# Altium PCB MainBoard.PcbDoc
Units mil, origin at the board's own origin, x right, y up, seen from the top; angles counter-clockwise.
Board outline 1122 x 925 mil, 4 copper layers (Top1, GND, PWR, Bottom4), stack 50.526 mil thick; 32 components, 52 nets, 214 pads, 134 vias.
Unrouted connection lines stored in the file: 36.
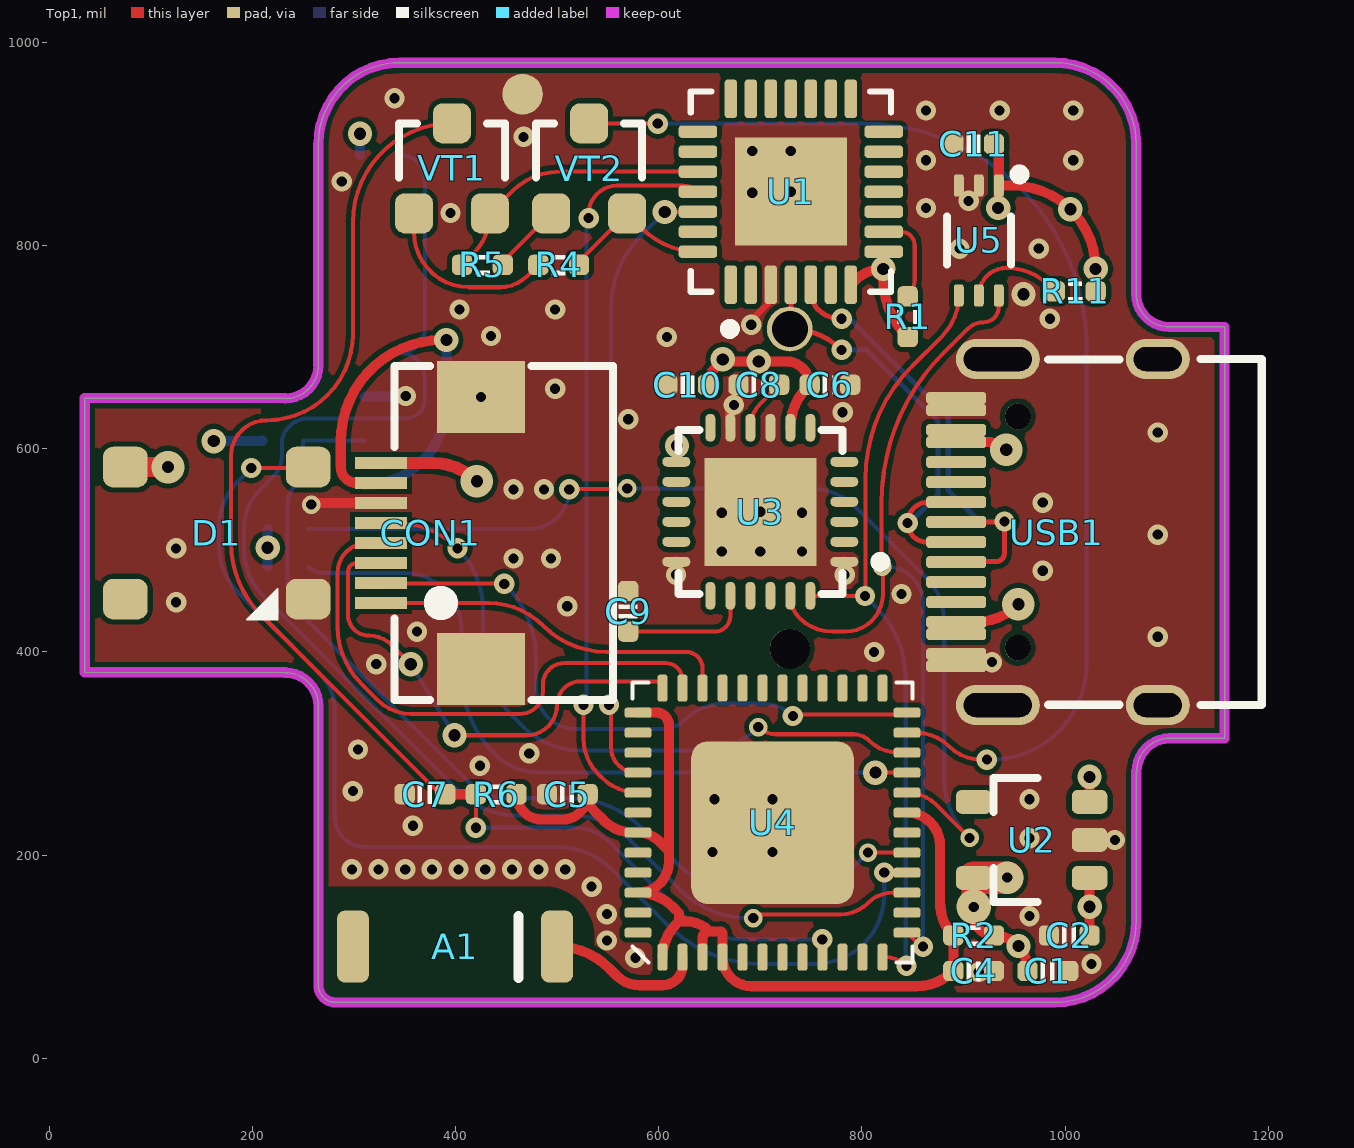
[diagram p0: Top1 view]
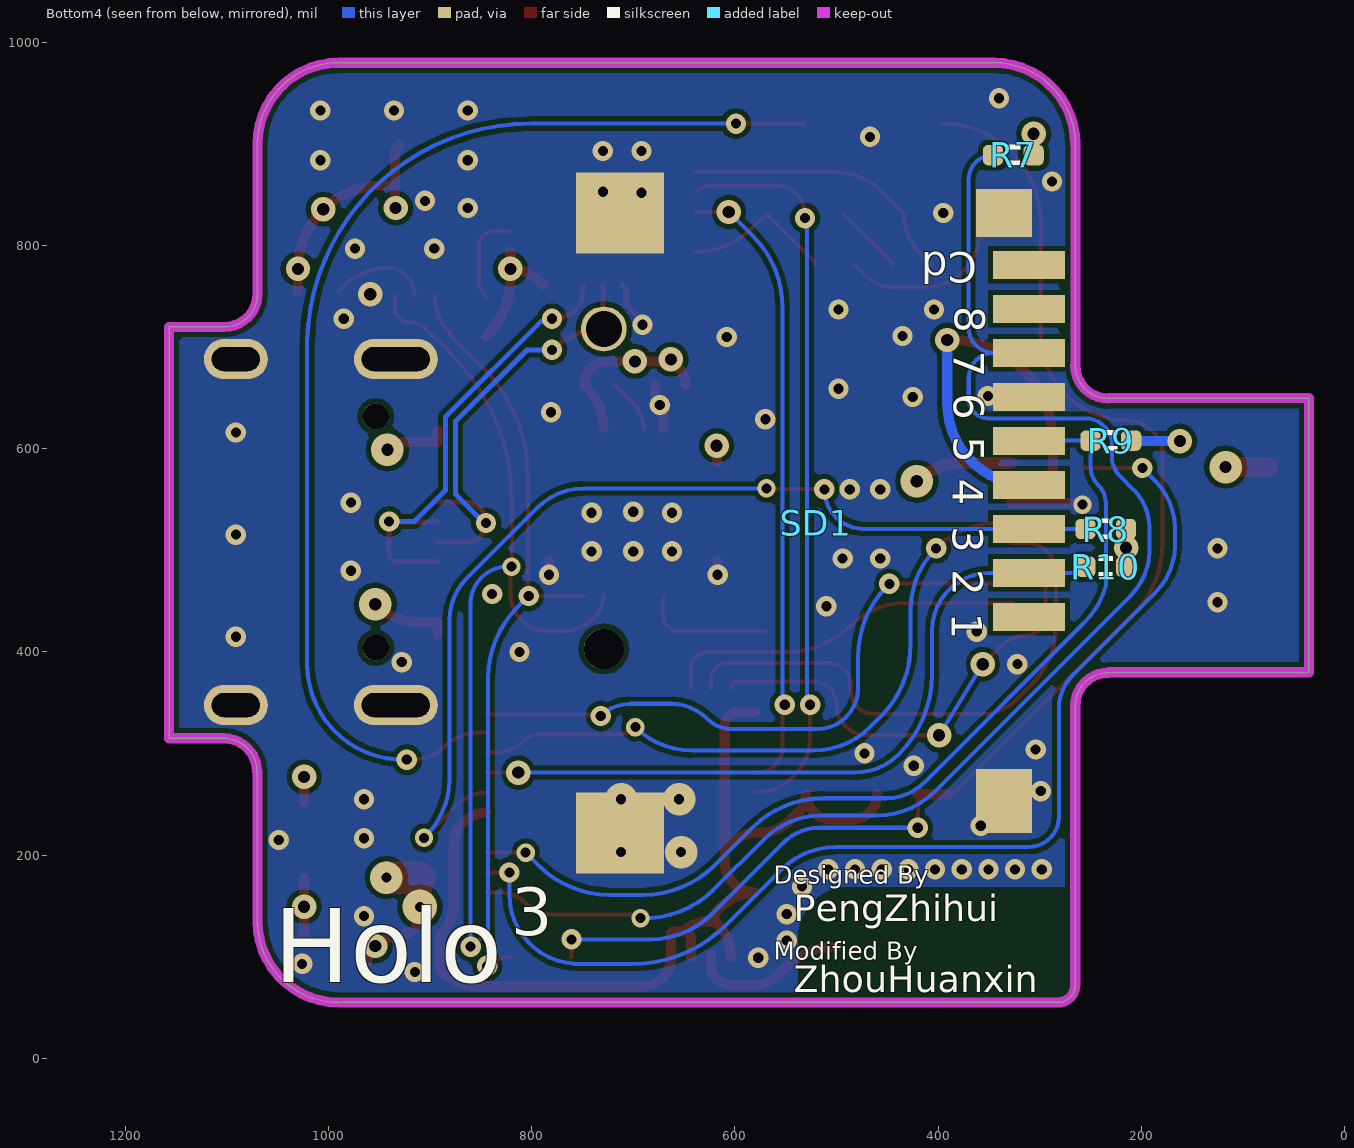
[diagram p1: Bottom4 view, seen from below]
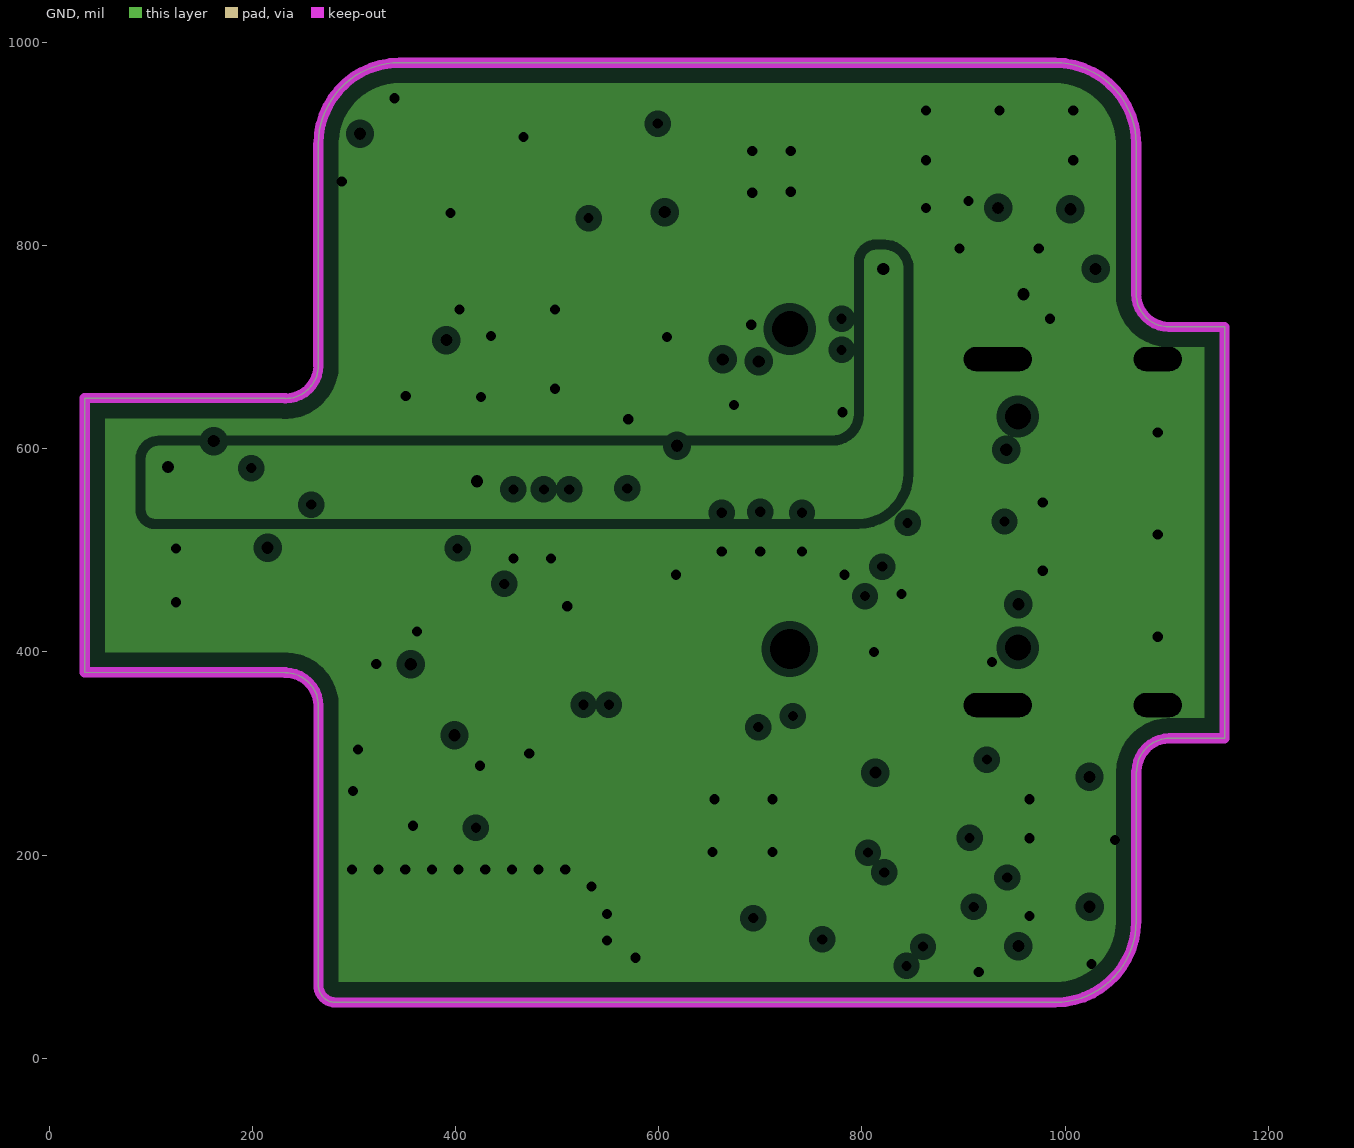
[diagram p2: GND, clearances drawn from the general rule]
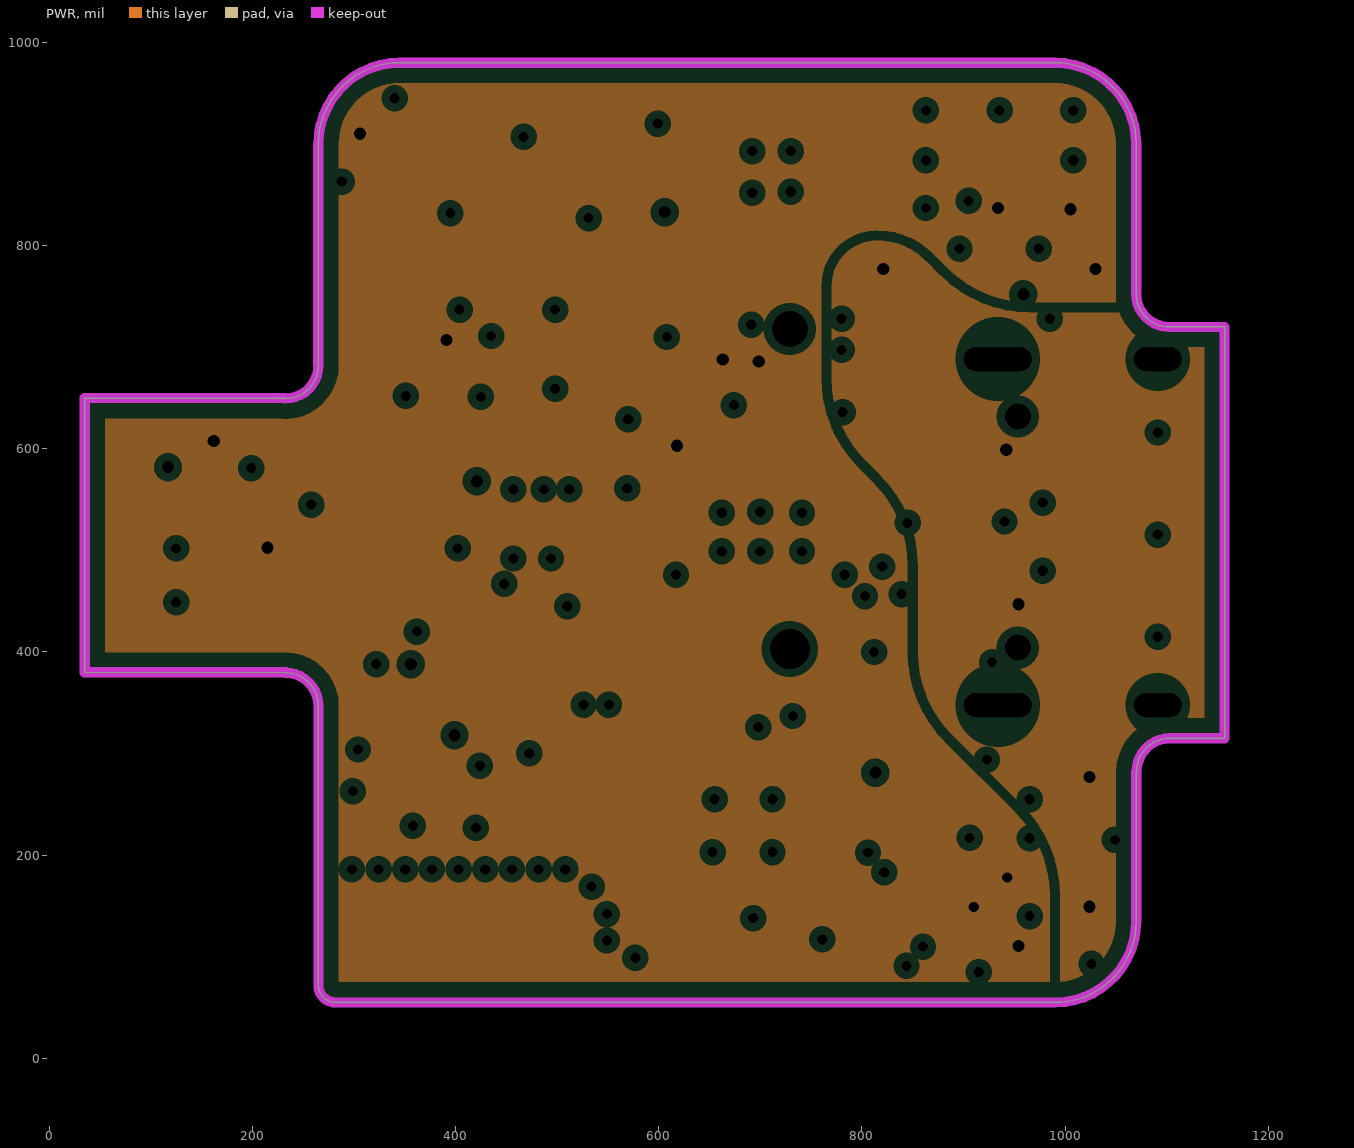
[diagram p3: PWR, clearances drawn from the general rule]
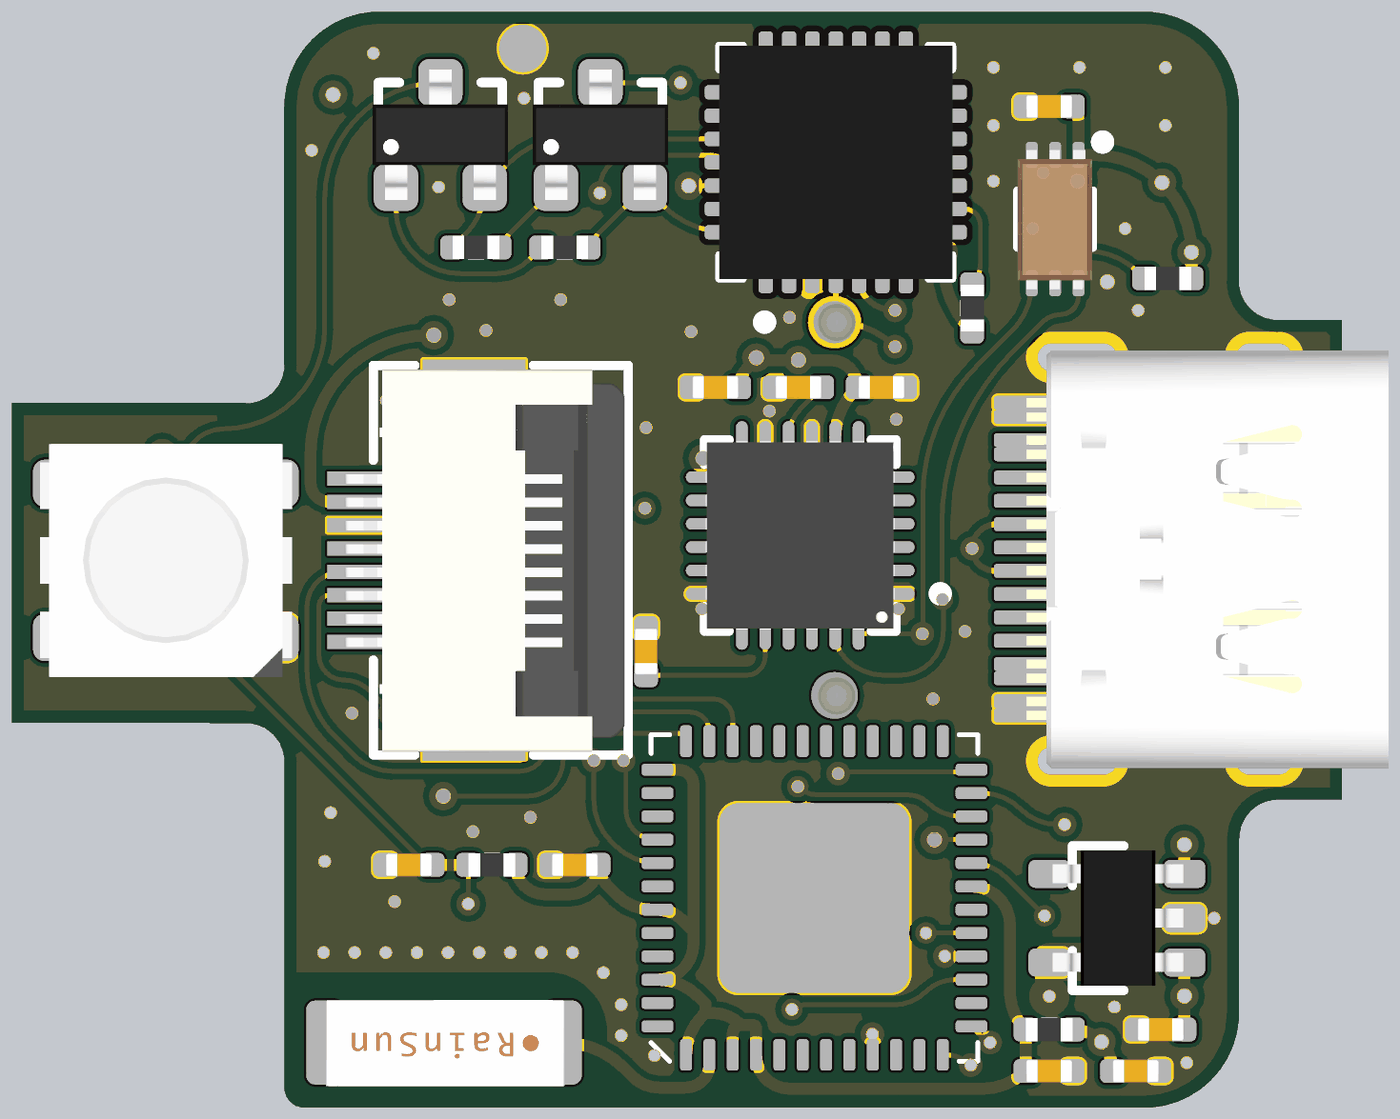
[diagram p4: 3D render of the assembled board from above, using the file's embedded part models]
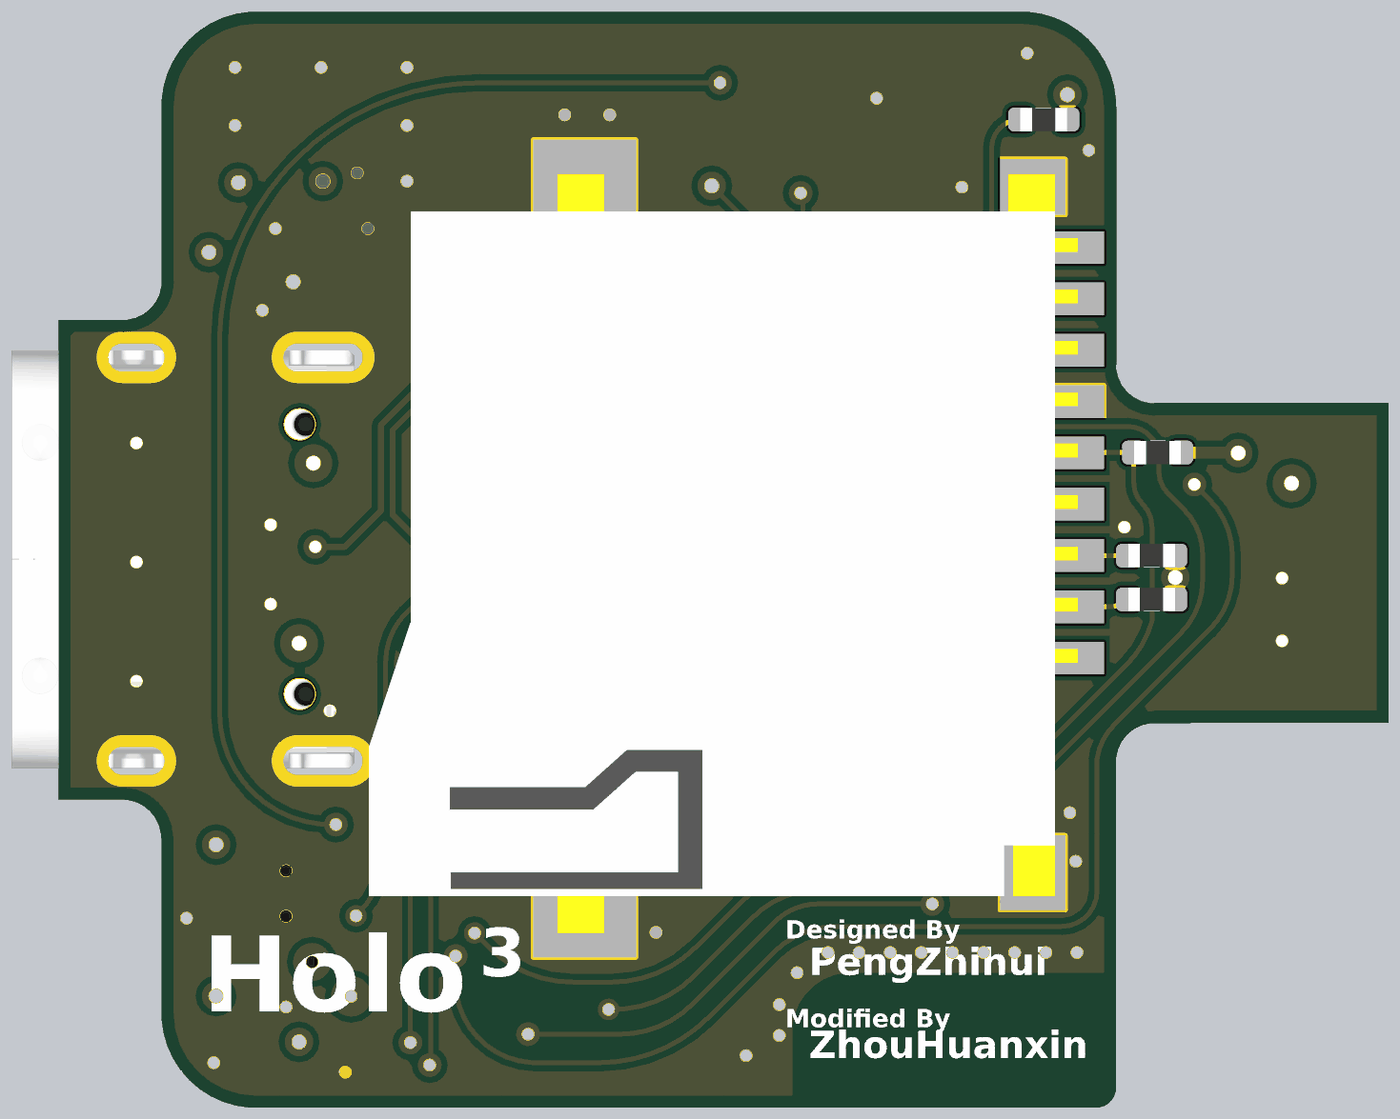
[diagram p5: 3D render of the assembled board from below, using the file's embedded part models]

## Layer stack, top to bottom
Top Solder: solder mask 0.4, Solder Resist, Dk 3.5
Top1: signal copper 1.4
Dielectric 1: prepreg 2.8, PP-006, Dk 4.1
GND: plane copper 1.378, net (Multiple Nets)
Dielectric 2: core 39.37, PP-006, Dk 4.2
PWR: plane copper 1.378, net (Multiple Nets)
Dielectric 3: prepreg 2.8, PP-006, Dk 4.1
Bottom4: signal copper 1.4
Bottom Solder: solder mask 0.4, Solder Resist, Dk 3.5

## Board outline
232.4,379.6 cw(c232.4,347) 265,347 265,72.07 ccw(c282.07,72.07) 282.07,55 990,55 ccw(c990,135) 1070,135 1070,282.4 1070.4,282.4 cw(c1103,282.4) 1103,315 1157,315 1157,720 1102.5,720 1102.5,719.9 cw(c1102.5,752.5) 1069.9,752.5 1070,752.5 1070,900 ccw(c990,900) 990,980 345,980 ccw(c345,900) 265,900 264.82,900 264.82,682 265,682 cw(c232.4,682) 232.4,649.4 232.4,649.82 35,649.82 35,380

## Design rules (kind name [scope] priority, off if disabled: settings)
BoardOutlineClearance [All] p1: gap=10 ignorepadtopadclearanceinfootprint=FALSE
Clearance [All] p1: gap=5 ignorepadtopadclearanceinfootprint=FALSE
ComponentClearance [All] p1: gap=0 collisioncheckmode=3 verticalgap=0 showdistances=FALSE
DiffPairsRouting [All] p1: maxlimit=5 minlimit=5 mostfreqgap=5 toplayer_minwidth=5 toplayer_maxwidth=5 toplayer_prefwidth=5 bottomlayer_minwidth=5 bottomlayer_maxwidth=5 bottomlayer_prefwidth=5 maxuncoupledlength=500
FanoutControl Fanout_BGA [All] p1: bgadir=Out bgaviamode=Centered fanoutstyle=Auto fanoutdirection=Alternating viagrid=1 // Fanout_BGA (Default Rule)
HoleSize [All] p1: absolutevalues=TRUE maxlimit=10000 minlimit=8 maxpercent=80.000 minpercent=20.000
MinimumSolderMaskSliver [All] p1 off: minsoldermaskwidth=2
PlaneClearance [All] p1: clearance=8
PlaneConnect [All] p1: planeconnectstyle=Direct reliefexpansion=20 reliefentries=4 reliefconductorwidth=10 reliefairgap=10
PolygonConnect [All] p1: connectstyle=Direct reliefconductorwidth=10 reliefentries=4 polygonreliefangle="90 Angle" airgapwidth=10
RoutingVias [All] p1: holewidth=8 width=16 viastyle="Through Hole" minholewidth=6 minwidth=12 maxholewidth=28 maxwidth=50
SilkToBoardRegionClearance [All] p1 off:
SilkToSilkClearance [All] p1: silktosilkclearance=0
SilkToSolderMaskClearance [IsPad] p1: minsilkscreentomaskgap=0 clearancetoexposedcopper=TRUE
SolderMaskExpansion [All] p1: expansion=2 istentingtop=FALSE
Width [All] p1: maxlimit=10000 minlimit=4 preferedwidth=4
20 further rules are at their usual default settings.

## Classes and differential pairs
net class GND: GND
component class Main: A1 C1 C2 C4 C5 C6 C7 C8 C9 C10 C11 D1 R1 R2 R4 R5 R6 R7 R8 R9 R10 R11 U1 U2 U3 U4 U5 USB1 VT1 VT2
differential pair USB2.0: +USB-PWR-DP -USB-PWR-DM

## Components (designator, comment, footprint, x,y, rotation, side; value= is the part's Value field where it differs from the comment)
A1 "RAINSUN" ANT-Rainsun-AN5120 400,110 r180 top
C1 "1uF" CAP_0402 983,86 r180 top value=0.1u
C2 "1uF" CAP_0402 1004.06,121 r0 top value=0.1u
C4 "10uF" CAP_0402 910,86 r180 top value=0.1u
C5 "0.1uF" CAP_0402 510,260 r0 top value=0.1u
C6 "10nF" CAP_0402 768.5,663 r0 top value=0.1u
C7 "2.2uF" CAP_0402 370,260 r180 top value=0.1u
C8 "0.1uF" CAP_0402 698.5,663 r180 top value=0.1u
C9 "2.2nF" CAP_0402 570,440 r270 top value=0.1u
C10 "0.1uF" CAP_0402 628.5,663 r0 top value=0.1u
C11 "0.1uF" CAP_0402 910,900 r180 top value=0.1u
CON1 "FFC_0.5_8" FPC0.5-8P 425,517.14 r90 top
D1 "RGB" LED_5050_WS2812B 165,517 r0 top
R1 "10K" RES_0402 845,730 r90 top value=22R
R2 "0R" RES_0402 910,121 r180 top value=22R
R4 "12K" RES_0402 501.5,781 r180 top value=22R
R5 "12K" RES_0402 426.5,781 r0 top value=22R
R6 "10K" RES_0402 440,260 r180 top value=22R
R7 "10K" RES_0402 326,889 r0 bottom value=22R
R8 "10K" RES_0402 235,521 r0 bottom value=22R
R9 "10K" RES_0402 230,608 r0 bottom value=22R
R10 "10K" RES_0402 235,484 r0 bottom value=22R
R11 "10K" RES_0402 1010,755 r0 top value=22R
SD1 "Comment" "Micro SD ( TF CARD )" 713.25,832.13 r270 bottom locked
U1 "CP2102" QFN-28 730,853 r90 top locked value=Value
U2 "LP2992 3V3" SOT23-5 965,215 r180 top
U3 "MPU6050" QFN-24 700,538 r180 top locked
U4 "ESP32_SIP" QFN-48_7X7 712,232 r90 top locked
U5 "BH1750FVI-TR" BH1750FVI 915,805 r270 top
USB1 "Type-C" Type-C-TOP 992,518 r0 top
VT1 "S8050" SMT_TRIODE_NPN 396.5,876 r0 top
VT2 "S8050" SMT_TRIODE_NPN 531.5,876 r0 top

## Footprints (in the part's own frame and the unit in brackets; to place one, negate y for a bottom-side part, rotate by r counter-clockwise, add the part's x,y. Pads: shape width x height; smd on the part's side, far side on the other; paste and mask are expansions set on the pad)
ANT-Rainsun-AN5120 [mm] "选择焊盘"
  rrect50% 0.8x1.8 smd: 1(-2.54,0) ""(2.563,0)
  silkscreen extent -1.57,-0.76 -1.57,0.79, body extent -2.57,-0.91 2.54,0.94, height 1.32
BH1750FVI [mm]
  rrect50% 0.55x0.25 smd paste+0 mask+0: 1(-1.375,0.5) 2(-1.375,0) 3(-1.375,-0.5) 4(1.375,-0.5) 5(1.375,0) 6(1.375,0.5)
  silkscreen extent -1.78,-0.8 0.6,1.14, body extent -1.49,-0.81 1.51,0.79, height 0.77
CAP_0402 [mil]
  rrect50% 20x20 smd: 1(-20,0) 2(20,0)
  silkscreen extent -7,-9 7,9, body extent -20,-10 20,10, height 20
FPC0.5-8P [mm]
  rect 1.8x2.2 smd: 0(-3.4,0) 0(3.4,0)
  rect 0.3x1.3 smd: 1(-1.75,2.497) 2(-1.25,2.497) 3(-0.75,2.497) 4(-0.25,2.497) 5(0.25,2.497) 6(0.75,2.497) 7(1.25,2.497) 8(1.75,2.497)
  silkscreen extent -4.17,-3.3 4.17,2.16, body extent -4.11,-3.23 4.09,2.77, height 2
LED_5050_WS2812B [mil]
  rrect50% 44x40 smd: 1(-90,65) 2(-90,-65) 3(90,-65) 4(90,65)
  silkscreen extent 30,-85 60,-55, body extent -106,-98 106,98, height 69
"Micro SD ( TF CARD )" [mm]
  rect 2.032x2.2 smd: 0(0,0) 0(15.5,0)
  rect 1.2x1.4 smd: 0(0,9.6)
  oval 1.118x1.143 hole 0.9: 0(2.9,-0.4)
  round 1 hole 1 unplated: 0(10.9,-0.4)
  rect 1.6x1.4 smd: 0(14.7,9.6)
  rect 0.7x1.8 smd: 1(10.1,10.227) 2(9,10.227) 3(7.9,10.227) 4(6.8,10.227) 5(5.7,10.227) 6(4.6,10.227) 7(3.5,10.227) 8(2.4,10.227) 9(1.3,10.227)
  body extent -0.27,-4.63 16,10.57, height 1.8
QFN-24 [mm] "QFN, 24-Leads, Body 4.1x4.1mm (max), Pitch 0.50mm, IPC Low Density"
  oval 0.7x0.25 smd: 1(-2.1,1.25) 2(-2.1,0.75) 3(-2.1,0.25) 4(-2.1,-0.25) 5(-2.1,-0.75) 6(-2.1,-1.25) 13(2.1,-1.25) 14(2.1,-0.75) 15(2.1,-0.25) 16(2.1,0.25) 17(2.1,0.75) 18(2.1,1.25)
  oval 0.25x0.7 smd: 7(-1.25,-2.1) 8(-0.75,-2.1) 9(-0.25,-2.1) 10(0.25,-2.1) 11(0.75,-2.1) 12(1.25,-2.1) 19(1.25,2.1) 20(0.75,2.1) 21(0.25,2.1) 22(-0.25,2.1) 23(-0.75,2.1) 24(-1.25,2.1)
  rect 2.8x2.7 smd: ""(0,0)
  silkscreen extent -3.13,-2.05 2.05,2.05, body extent -2.02,-2.02 2.02,2.02, height 0.95
QFN-28 [mil]
  rrect50% 38x12 smd mask+5: 1(-91.5,59.06) 2(-91.5,39.37) 3(-91.5,19.68) 4(-91.5,0) 5(-91.5,-19.69) 6(-91.5,-39.37) 7(-91.5,-59.06) 15(91.5,-59.06) 16(91.5,-39.37) 17(91.5,-19.69) 18(91.5,0) 19(91.5,19.68) 20(91.5,39.37) 21(91.5,59.06)
  rrect50% 12x38 smd mask+5: 8(-59.06,-91.5) 9(-39.37,-91.5) 10(-19.68,-91.5) 11(0,-91.5) 12(19.69,-91.5) 13(39.37,-91.5) 14(59.06,-91.5) 22(59.06,91.5) 23(39.37,91.5) 24(19.69,91.5) 25(0,91.5) 26(-19.68,91.5) 27(-39.37,91.5) 28(-59.06,91.5)
  rect 106.3x110.24 smd: 29(0,0)
  silkscreen extent -140,-98 98,98, body extent -98,-98 98,98, height 35
QFN-48_7X7 [mm]
  rrect20% 4.064x4.064 smd: 0(0,0)
  rrect50% 0.675x0.25 smd: 1(-3.363,2.75) 2(-3.363,2.25) 3(-3.363,1.75) 4(-3.363,1.25) 5(-3.363,0.75) 6(-3.363,0.25) 7(-3.363,-0.25) 8(-3.363,-0.75) 9(-3.363,-1.25) 10(-3.363,-1.75) 11(-3.363,-2.25) 12(-3.363,-2.75) 25(3.363,-2.75) 26(3.363,-2.25) 27(3.363,-1.75) 28(3.363,-1.25) 29(3.363,-0.75) 30(3.363,-0.25) 31(3.363,0.25) 32(3.363,0.75) 33(3.363,1.25) 34(3.363,1.75) 35(3.363,2.25) 36(3.363,2.75)
  rrect50% 0.25x0.675 smd: 13(-2.75,-3.363) 14(-2.25,-3.363) 15(-1.75,-3.363) 16(-1.25,-3.363) 17(-0.75,-3.363) 18(-0.25,-3.363) 19(0.25,-3.363) 20(0.75,-3.363) 21(1.25,-3.363) 22(1.75,-3.363) 23(2.25,-3.363) 24(2.75,-3.363) 37(2.75,3.363) 38(2.25,3.363) 39(1.75,3.363) 40(1.25,3.363) 41(0.75,3.363) 42(0.25,3.363) 43(-0.25,3.363) 44(-0.75,3.363) 45(-1.25,3.363) 46(-1.75,3.363) 47(-2.25,3.363) 48(-2.75,3.363)
  silkscreen extent -3.5,-3.5 3.5,3.5, body extent -3.5,-3.5 3.5,3.5, height 1
RES_0402 [mil]
  rrect50% 20x20 smd: 1(-20,0) 2(20,0)
  silkscreen extent -7,-10 7,10, body extent -20,-10 20,10, height 14
SMT_TRIODE_NPN [mm] "Surface mount NPN transistor, package SOT-23"
  rrect50% 0.95x1 smd: 1(-0.95,-1.125) 2(0.95,-1.125) 3(0,1.125)
  silkscreen extent -1.33,-0.22 1.32,1.13, body extent -1.45,-1.4 1.45,1.4, height 1.3
SOT23-5 [mm] "SOT23, 3-Leads, Body 3.1x3.0mm (max), Pitch 0.95mm, IPC Medium Density"
  rrect50% 0.889x0.6 smd: 1(-1.5,0.95) 2(-1.5,0) 3(-1.5,-0.95) 4(1.396,-0.95) 5(1.396,0.95)
  silkscreen extent -0.2,-1.55 0.9,1.55, body extent -1.48,-1.45 1.32,1.45, height 1.2
Type-C-TOP [mm]
  round 0.65 hole 0.65: 0(-0.98,-2.89) 0(-0.98,2.89)
  oval 1.6x1 hole 0.6 slot 1.2 at 0 deg: 1(2.52,4.325) 2(2.52,-4.325)
  oval 2.1x1 hole 0.6 slot 1.7 at 0 deg: 3(-1.48,-4.325) 4(-1.48,4.325)
  rrect50% 1.5x0.3 smd: A1(-2.52,-3.35) A4(-2.52,-2.55) A5(-2.52,-1.25) A6(-2.52,-0.25) A7(-2.52,0.25) A8(-2.52,1.25) A9(-2.52,2.55) A12(-2.52,3.35) B1(-2.52,3.05) B4(-2.52,2.25) B5(-2.52,1.75) B6(-2.52,0.75) B7(-2.52,-0.75) B8(-2.52,-1.75) B9(-2.52,-2.25) B12(-2.52,-3.05)
  silkscreen extent -0.22,-4.33 5.12,4.33, body extent -2.57,-4.48 5.18,4.48, height 3.26

## Part data
A1: library part ANT-Rainsun-AP5120
C1 C2 C4 C5 C6 C7 C8 C9 C10 C11: library part 电容-0402, "Capacitor"
D1: library part LED_5050_WS2812B, "LED", Type=5050
R1 R2 R4 R5 R6 R7 R8 R9 R10 R11: library part 电阻-0402, "Resistor"
U1: "USB转TTL", MFG #1="SILICON LABS", PART DESC="SINGLE-CHIP USB TO UART BRIDGE, QFN28, RoHS.", PART NUMBER=CP2102, RefDes=RefDes, Type=DEV
U2: library part LP2992, "LDO"
U3: "六轴传感器"
U4: library part ESP32-PICO
USB1: library part USB-Type-C-TOP
VT1 VT2: library part SMT_TRIODE_NPN, "Surface mount NPN transistor, package SOT-23"

## Free pads (board coordinates)
  round 40 smd: 7(466,949)

## Via types
v1: diameter 20, hole 10, Top1 to Bottom4, tented both sides, 98 vias
v2: diameter 24, hole 12, Top1 to Bottom4, tented both sides, 19 vias
v3: diameter 18, hole 10, Top1 to Bottom4, tented both sides, 7 vias
v4: diameter 32, hole 10, Top1 to Bottom4, tented both sides, 5 vias
v5: diameter 32, hole 12, Top1 to Bottom4, tented both sides, 4 vias
v6: diameter 34, hole 10, Top1 to Bottom4, tented both sides, 1 vias

## Nets (pads, with @x,y where several pads share a name; then routed paths per layer and width w, separated by ;. In a path a pad name is that pad's centre, name@x,y a point inside that pad or via, vN(x,y) a via of type N, cw(c..) or ccw(c..) an arc to the next point about the centre after c; other vN are vias at no path point)
3V3: C1.2 C6.1 C10.2 C11.1 CON1.7 R2.1 R7.1 R8.1 R9.1 R10.1 R11.2 SD1.4 U2.5 U3.8 U3.13 U5.1 | length 1103.2
  Top1 w10: CON1.7 302.74,566.35 cw(c302.74,582.1) 287,582.1 287,607 cw(c387,607) 387,707 v2(391,707) ; U3.13 617.58,587.21 617.66,587.29 617.66,602.66 v2(618,603) ; C10.2 cw(c671.5,663) 671.5,686 725.5,686 cw(c725.5,663) C6.1 746.04,660.54 ccw(c785.9,620.68) U3.8 ; v6(910.06,149.07) 910.06,140.94 ccw(c930,140.94) R2.1 cw(c930,88) 963,88 C1.2 ; C11.1 cw(c918.69,888.69) 934.69,888.69 U5.1 ; v2(934,837) 934.61,837.61 934.61,859.06 U5.1 ; R11.2 v2(1030,777) ccw(c947.87,777) 947.87,859.13 U5.1
  Top1 w24: v6(910.06,149.07) U2.5
  Top1 w32: U2.5 910.46,178 v4(943,178)
  Bottom4 w10: v2(162,607.56) 162.22,607.78 209.78,607.78 R9.1 ; R10.1 R8.1 ; R7.1 v2(306,910) ; SD1.4 ccw(c310.61,644.8) 391,644.8 v2(391,707)
  other v2: 954.08,110.56 215,502.5 698.5,686 663,688 1005.19,835.82
3V3A: C4.2 C5.2 R2.2 R6.1 U4.1 U4.3 U4.4 U4.19 U4.37 U4.43 U4.46 | length 1042.2
  Top1 w10: R6.1 ccw(c485,260) 485,235 505,235 ccw(c505,260) C5.2 ccw(c554.14,260) 537.07,242.93 545.76,234.24 ccw(c574.93,263.42) 574.93,222.16 U4.43 cw(c579.62,192.06) 600.9,213.34 610,204.24 ; U4.37 597.73,340.27 cw(c597.73,328) 610,328 610,204.24 ; U4.1 cw(c649.88,99.62) 617.23,132.23 ; 617.25,132.25 620,135 ; U4.3 643.1,118.1 cw(c650,118.1) 650,125 ; U4.19 cw(c844.38,209.22) 877,209.22 877,152.38 ccw(c921.38,152.38) 877.14,148.86 ccw(c921.38,152.38) R2.2 C4.2 ; C4.2 cw(c853.79,122.21) 853.79,71 691.41,71 cw(c691.41,99.62) U4.4 662.79,122.21 ccw(c660,122.21) 660,125 650,125 ; 610,204.24 610,193.48 cw(c579.62,193.48) U4.46 cw(c579.62,114.14) 614.24,148.76 620,143 620,135 ; 620,135 625.86,135 cw(c625.86,100.86) 649.98,125.02
BH_SCL: U3.23 U4.13 U5.6 | length 890.8
  Top1 w4: U3.23 ccw(c760.47,455.32) 738.56,433.48 ccw(c771.05,465.91) 771.06,420 783.75,420 ccw(c783.75,456.93) 820.68,456.93 820.68,483.32 v3(820,484) 819.46,484.54 819.46,546.63 ; 819.46,546.66 cw(c1026.64,547.57) 880.16,694.1 904.14,718.07 cw(c919.41,702.84) 919.41,724.41 ccw(c919.41,739.69) 934.69,739.69 U5.6 ; U4.13 856.7,111.41 ccw(c860.11,114.83) v1(860.11,110)
  Bottom4 w4: v3(820,484) 823.87,484 cw(c823.87,447.75) 860.11,447.75 v1(860.11,110)
BH_SDA: U3.24 U4.12 U5.4 | length 781.4
  Top1 w4: U3.24 749.54,455 v1(803,455) 803.46,455.46 803.46,570.6 cw(c959.68,570.75) 849.21,681.21 878.68,710.68 ccw(c838.46,750.87) U5.4 ; U4.12 823.06,99.62 cw(c823.06,70.19) 832.87,97.93 cw(c823.06,70.19) v1(843.87,91)
  Bottom4 w4: v1(803,455) 813.82,444.18 cw(c743.11,373.46) 843.11,373.81 cw(c743.11,373.46) 843.11,373.46 843.11,91.75 v1(843.87,91)
CP_Rx: U1.25 U4.41 | length 726.8
  Top1 w4: v1(526,348) 526,314.6 ccw(c575.16,314.6) 540.4,279.84 543.92,276.31 ccw(c579.62,312.01) U4.41 ; v1(531,827) 531,831 cw(c559,831) 559,859 624.01,859 cw(c624.01,838.51) U1.25
  Bottom4 w4: v1(526,348) 529,351 529,825 v1(531,827)
CP_Tx: U1.26 U4.40 | length 619.6
  Top1 w4: v1(551,348) 553,346 553,306.27 ccw(c578.06,306.27) 578.06,281.21 U4.40 ; v2(606,833) 638.19,833 U1.26
  Bottom4 w4: v1(551,348) 553,350 553,738.58 cw(c653,738.58) 582.29,809.29 v2(606,833)
DC: CON1.5 U4.22 | length 671.9
  Top1 w4: CON1.5@328,526.84 342.03,526.84 cw(c342.03,442.03) v1(402,502) ; v3(698,326) ccw(c714.9,342.9) 714.9,319 791.74,319 cw(c791.74,296.63) 807.55,312.45 ccw(c835.47,340.41) 835.47,300.9 U4.22
  Bottom4 w4: v1(402,502) cw(c341.64,441.64) 427,441.64 427,407.46 ccw(c527,407.46) 456.29,336.74 467.01,326.02 ccw(c522.61,381.63) 522.62,303 642.47,303 ccw(c642.47,381.53) v3(698,326)
DTR: R4.1 U1.28 VT2.2 | length 152.3
  Top1 w4: R4.1 521.5,784.31 VT2.2 VT2.2@584.16,816.46 ; VT2.2@584.18,816.43 ccw(c638.5,870.8) U1.28
EN: C7.1 R6.2 U4.9 VT1.3 | length 1331.1
  Top1 w4: C7.1 cw(c390,272.07) 381.46,263.54 271.54,373.46 208.29,436.71 cw(c279,507.42) 179,507.42 179,593 cw(c214,593) 214,628 ccw(c214,713) 299,713 299,822.79 cw(c396.5,822.79) VT1.3 ; v1(420,227) R6.2 ; v1(760.89,117.11) 761.05,116.95 761.05,99.78 U4.9
  Top1 w10: C7.1 R6.2
  Bottom4 w4: v1(420,227) 516.61,227 cw(c516.61,176.44) 528.41,225.6 cw(c516.61,176.44) 540.2,221.16 cw(c516.61,176.44) 546.96,216.87 cw(c516.61,176.44) 552.36,212.19 cw(c485.31,138) 556.02,208.71 622.44,142.29 ccw(c683.24,203.09) 683.24,117.11 v1(760.89,117.11)
FLASH_CLK: U4.31
FLASH_CS: U4.25
FLASH_SD0: U4.27
FLASH_SD1: U4.33
FLASH_SD2: U4.30
FLASH_SD3: U4.32
GND: C1.1 C2.1 C4.1 C5.1 C6.2 C7.2 C8.2 C9.1 C10.1 C11.2 CON1.0 CON1.6 D1.3 pad.7 SD1.0@335.3,253.39 SD1.0@335.3,832.13 SD1.0@713.25,221.9 SD1.0@713.25,832.13 SD1.6 U1.3 U1.29 U2.2 U3. U3.1 U3.9 U3.11 U3.18 U4.0 U5.2 U5.3 USB1.1 USB1.2 USB1.3 USB1.4 USB1.A1 USB1.A12 USB1.B1 USB1.B12 | length 229.1
  Top1 w6: v1(691,722) 693.68,724.68 693.68,728.86 707.32,742.5 707.32,758.5 U1.3
  Top1 w10: v3(258,545) cw(c261.69,541.31) 261.69,546.53 CON1.6@328,546.53 ; v1(617,476) 617.16,476.16 617.16,488.71 617.24,488.79 U3.18 ; U3.11 670.47,634.48 cw(c682.52,634.48) v1(674,643) ccw(c663.14,653.86) 678.5,653.86 C8.2 ; U3.1 U3.1 782.84,488.71 782.84,476.16 v1(783,476)
  Bottom4 w10: SD1.6 311.1,651.52 350.52,651.52 v1(351,652)
  other v1: 915,85 1026,93 577,99 549,116 965,140 549,142 534,169 298,186 324.25,186 350.5,186 376.75,186 403,186 429.25,186 455.5,186 481.75,186 508,186 1049,215 965,216.67 358,229 965,255 299,263 424,288 472.5,300.18 304,304 322,388 928,390 812,400 1091.21,415 362,420 510,445 125,449 839,457 978,480 457,492 494,492 662,499 700,499 741,499 125,502 1091.21,515.5 662,537 741,537 700,538 978,547 457,560 487,560 1091.21,616 570,629 781,636 425,651 498,659 608,710 435,711 985,728 404,737 498,737 896,797 974,797 395,832 863,837 905,844 692,852 730,853 288,863 863,884 1008,884 692,893 730,893 467,907 863,933 935.5,933 1008,933 340,945
  other v2: 959,752
  other v4: 653,203 712,203 655,255 712,255
GPIO0: U4.23 VT2.3 | length 1164.7
  Top1 w4: VT2.3 531.79,920 v1(599,920) ; U4.23 853.27,320.58 cw(c853.27,274.35) 885.93,307.07 ; 885.96,307.04 ccw(c917.44,338.53) 917.44,294 v1(923,294)
  Bottom4 w4: v1(599,920) 801.19,920 cw(c801.19,700.09) 1021,706.57 1021,388.05 cw(c926.94,388.05) v1@923,294.07
GPIO4: CON1.2 U4.24 | length 631.3
  Top1 w4: CON1.2@328,467.79 328.39,467.39 447.61,467.39 v1(448,467) ; v1(732,337) 733.63,338.63 842.75,338.63 U4.24
  Bottom4 w4: v1(448,467) 449.71,465.29 cw(c379,394.58) 479,394.58 479,364 ccw(c519,364) 519,324 602.86,324 ccw(c602.86,358.14) 627,334 cw(c663.21,297.79) 663.21,349 703.03,349 cw(c703.03,308.03) v1(732,337)
GPIO5: CON1.1 U4.34 | length 358
  Top1 w4: CON1.1 432.3,448.24 cw(c432.3,372.3) 486,426 ccw(c548.77,488.77) 548.77,400 627,400 cw(c627,383.9) 643.1,383.9 U4.34
GPIO9: U4.28
GPIO10: U4.29
GPIO12: U4.18
GPIO13: R8.2 SD1.3 U4.20 | length 1010.7
  Top1 w4: v1(512,560) 512.5,560.5 568.5,560.5 v3(569,561) ; U4.20 cw(c844.38,220.27) 873.56,249.44 v3(906,217)
  Bottom4 w4: R8.2 310.61,521 SD1.3 473.11,521.11 ccw(c473.11,560) 477.34,521.34 ccw(c473.11,560) 511.77,555.77 ccw(c473.11,560) v1(512,560) ; v3(569,561) 748.57,561 cw(c748.57,496.17) 794.4,542.02 863.71,472.71 cw(c821.97,430.97) 881,430.97 881,275.34 ccw(c961.5,275.34) 904.58,218.42 v3(906,217)
GPIO14: R9.2 SD1.5 U4.17 | length 951.6
  Top1 w4: v3(806,202.47) U4.17
  Bottom4 w4: SD1.5 310.61,608 R9.2 250,581.9 cw(c226.1,581.9) 243,565 ccw(c261.87,545.45) 234.7,545.45 234.7,465.6 ccw(c315.8,488.3) 256.25,428.75 413.25,271.75 ccw(c451.28,309.79) 451.31,256 512.58,256 cw(c512.58,156) 583.29,226.71 619.71,190.29 ccw(c690.42,261) 690.42,161 723.11,161 ccw(c723.11,261) 793.82,190.29 v3(806,202.47)
GPIO15: R10.2 SD1.2 U4.21 | length 726
  Top1 w4: v2(813.21,281.21) U4.21
  Bottom4 w4: R10.2 ccw(c269.96,498.96) 267.08,478 ccw(c269.96,498.96) 269.96,477.8 SD1.2 349.2,477.8 cw(c349.2,421) 406,421 406,378.12 ccw(c517.26,378.08) 438.6,299.4 ; 438.6,299.4 ccw(c482.52,343.33) 482.52,281.21 v2(813.21,281.21)
GPIO18: CON1.4 U4.35 | length 551.5
  Top1 w4: CON1.4@328,507.16 313.16,507.16 ccw(c313.16,478) 284,478 284,425.04 ccw(c363.98,425.04) 307.42,368.49 323.2,352.72 ccw(c356.31,385.83) 356.31,339 463.49,339 ccw(c463.49,361.51) 486,361.51 486,368 cw(c507,368) 507,389 607,389 cw(c607,372.58) 623.42,372.58 U4.35
GPIO19: U4.38
GPIO21: U4.42
GPIO22: U4.39
GPIO23: CON1.3 U4.36 | length 485.3
  Top1 w4: CON1.3 303.02,487.61 ccw(c303.02,478.69) 294.1,478.69 294.1,436.9 ccw(c315,436.9) 315,416 cw(c315,384.62) 337.19,406.81 v2(356,388) ; CON1.3@327.42,486.89 CON1.3@328,487.47 ; v2(399,318) 470,318 ccw(c470,348) 500,348 cw(c523,348) 523,371 597.11,371 cw(c597.11,364.38) U4.36
  Bottom4 w4: v2(356,388) v2(399,318)
GPIO25: U4.14
GPIO26: R7.2 SD1.7 U4.15 | length 1374.8
  Top1 w4: v3(693,138) cw(c702.14,128.86) 702.14,141.79 778.93,141.79 ccw(c778.93,180.07) 806,153 cw(c830.39,128.61) 830.39,163.1 U4.15
  Bottom4 w4: R7.2 cw(c346,865) 370,865 370,719 cw(c345.34,719) 345.34,694.34 cw(c345.34,669.81) 369.86,669.81 369.86,648.86 cw(c351,648.86) 351,630 255.39,630 ccw(c255.39,603.06) 229.09,608.9 ccw(c233,608.05) 229,608.08 229,592.55 cw(c201.35,592.55) 220.9,573 207.5,559.6 ccw(c245.29,522.03) 192,522.03 192,500.01 ccw(c254.78,500.01) 210.39,455.61 403.25,262.75 ccw(c460.59,320.1) 460.59,239 514.89,239 cw(c514.89,159.06) 515.01,239 cw(c514.89,159.06) 571.41,215.59 620.98,166.02 ccw(c688.62,233.67) v3@693,138.1
GPIO27: D1.4 U4.16 | length 1132.4
  Top1 w4: v1(199,581) 254,581 D1.4 ; v1(822,183) 822.11,182.89 U4.16@844.38,182.89
  Bottom4 w4: v1(199,581) 186.3,568.3 ccw(c232.89,521.71) 167,521.71 167,504.6 ccw(c231.74,504.56) 186,458.74 265.96,378.78 cw(c231.39,342.51) 280.96,349.83 cw(c277,349.27) 281,349.27 281,271.17 281,270.08 281,238 ccw(c311,238) 311,208 500.8,208 cw(c500.83,132.76) 554.04,185.96 608.74,131.26 ccw(c701.11,223.64) 701.11,93 753.84,93 ccw(c753.84,161.16) 758.14,93.14 ccw(c753.84,161.16) 822,161.16 v1(822,183)
GPIO34: U4.10
GPIO35: U4.11
GPIO37: U4.6
GPIO38: U4.7
NetA1_1: A1.1 U4.2 | length 155.9
  Top1 w10: A1.1 cw(c500,37.57) 551.21,88.79 558.81,81.19 ccw(c581,103.38) 581,72 603.51,72 ccw(c603.51,92.49) 618,78 ccw(c604.92,91.08) 623.42,91.08 U4.2@623.42,101.62
NetC3_2: 
NetC8_1: C8.1 U3.10 | length 52.6
  Top1 w4: U3.10 cw(c723.91,620.68) 700.04,644.54 C8.1
NetC9_2: C9.2 U3.20 | length 129.2
  Top1 w4: C9.2 655,420 ccw(c655,435.47) 670.47,435.47 U3.20
NetR1_2: R1.2 U1.9 | length 90.2
  Top1 w4: U1.9 838.37,813.63 cw(c838.37,800) 846.9,810.63 cw(c838.37,800) 852,800 852,766.9 cw(c828.1,766.9) R1.2
NetR3_2: 
NetR4_2: R4.2 VT1.1 | length 179.3
  Top1 w4: VT1.1 359.1,813.28 ccw(c413.38,813.28) 413.38,759 443.76,759 ccw(c443.78,796.94) 470.64,770.14 R4.2
NetR5_2: R5.2 VT2.1 | length 70.4
  Top1 w4: R5.2 446.5,784.11 VT2.1
NetR11_1: R11.1 U5.5 | length 97.4
  Top1 w4: U5.5 cw(c942.13,750.87) 942.13,778 cw(c942.13,717.97) 984.56,760.44 R11.1
RTS: R5.1 U1.24 VT1.2 | length 278.4
  Top1 w4: R5.1 417.42,791.92 ccw(c377.63,831.71) VT1.2 455.51,853.32 cw(c502.23,806.64) 502.23,872.68 U1.24
SENSOR_VN: U4.8
SENSOR_VP: U4.5
USB-PWR-DM: U1.5 USB1.A7 USB1.B7 | length 469.2
  Top1 w5: U1.5 749.69,754.66 ccw(c774.66,754.66) 757,737 ccw(c778.73,758.73) 778.73,728 v1(780,728) v1@779.63,728.37 ; USB1.B7 892.79,489 932,489 ccw(c932,497.34) 940.34,497.34 v1@940.34,527.84 ; USB1.A7 v1@940.34,527.84 ; v1(940.34,528.39) v1@940.34,527.84
  Bottom4 w5: v1(780,728) 782.87,725.13 791.07,725.13 885,631.2 885,559 915.61,528.39 v1(940.34,528.39)
USB-PWR-DP: SD1.0@729,717.96 U1.4 USB1.A6 USB1.B6 | length 462
  Top1 w5: U1.4 730,720.37 cw(c726.59,720.37) 729,717.96 730.14,717.96 cw(c730.14,647.45) v1(780,697.31) ; v1@847.24,527 849.9,529.66 v1@849.9,531.9 ; USB1.A6 863.84,508.16 cw(c863.84,527) v1(845,527) cw(c865.53,527) 865.53,547.53 USB1.B6
  Bottom4 w5: v1(780,697.31) 804.75,697.31 875,627.06 875,555.28 846.72,527 v1(845,527)
VDD_5V: C2.2 CON1.8 D1.1 R1.1 U1.7 U1.8 U2.1 U2.3 USB1.A4 USB1.A9 USB1.B4 USB1.B9 | length 489
  Top1 w10: U1.7 792.93,765.37 cw(c821,737.3) v2(821,777) ; U1.8 821,793.44 v2(821,777) ; R1.1 840.35,715 840.35,715.05 ccw(c832.55,708.79) 840.24,715.19 cw(c902.94,767.94) 826.53,738.36 ccw(c817.21,734.71) 826.34,738.8 cw(c840,745) 825.56,740.96 ccw(c815.94,738.21) 825.41,741.41 cw(c902.94,767.94) 822.5,752.33 cw(c902.94,767.94) 821,767.94 v2(821,777) ; USB1.A4 USB1.B9 911.55,429.42 ccw(c911.55,489.45) v5@953.97,446.97 ; USB1.A9 USB1.B4 923.69,606.58 cw(c923.69,580.69) 930.48,605.68 cw(c923.69,580.69) 932,605.22 cw(c923.69,580.69) v5(942,599) ; U2.3 v2(1024,277) ; C2.2 U2.1
  Top1 w12: CON1.8@328,585.9 377.79,585.9 cw(c377.79,524.79) v5(421,568)
  Top1 w20: D1.1 v5(117,582)
  other v2: 1024.06,149.3
  other v5: 954,447
pads on no net: A1. D1.2 SD1.0@729,403 SD1.1 SD1.8 SD1.9 U1.1 U1.2 U1.6 U1.10 U1.11 U1.12 U1.13 U1.14 U1.15 U1.16 U1.17 U1.18 U1.19 U1.20 U1.21 U1.22 U1.23 U1.27 U2.4 U3.2 U3.3 U3.4 U3.5 U3.6 U3.7 U3.12 U3.14 U3.15 U3.16 U3.17 U3.19 U3.21 U3.22 U4.26 U4.44 U4.45 U4.47 U4.48 USB1.0 USB1.A5 USB1.A8 USB1.B5 USB1.B8

## Polygon pours and split planes (outlines as drawn)
GND on Bottom4 "GND_L04_P001" (solid, remove dead copper, pour order 1): -52,1071 1309,1071 1309,-37 -52,-37
GND on Top1 "GND_L01_P000" (solid, remove dead copper, pour order 0): -24,1061 1303,1061 1303,-62 -24,-62
3V3 on PWR (split plane): 174 vertices, not listed, extent 55.1,75.1 1050.58,959.96
VDD_5V on PWR (split plane): 815,804.9 815.32,804.97 821.61,804.66 828.15,803.69 834.57,802.08 840.8,799.85 846.78,797.02 852.45,793.62 857.76,789.68 862.43,785.45 862.61,785.18 877.04,770.75 877.05,770.75 884.29,764.05 892.05,757.93 900.27,752.44 908.88,747.62 917.86,743.48 927.12,740.06 936.63,737.38 946.32,735.45 956.13,734.29 965.99,733.9 966,733.9 1053.27,733.9 1055.04,729.64 1057.9,724.47 1061.31,719.66 1065.25,715.25 1069.66,711.31 1074.47,707.9 1079.64,705.04 1085.1,702.78 1090.78,701.14 1096.6,700.15 1102.17,699.84 1102.5,699.81 1103.47,699.9 1136.9,699.9 1136.9,335.1 1103,335.1 1102.67,335.06 1097.1,334.75 1091.28,333.76 1085.6,332.13 1080.14,329.87 1074.97,327.01 1070.16,323.59 1065.75,319.65 1061.81,315.25 1058.4,310.43 1055.54,305.26 1053.28,299.8 1051.64,294.13 1050.65,288.3 1050.6,287.34 1050.56,287.21 1050.29,286.32 1049.9,282.4 1049.9,135 1049.96,134.41 1049.62,128.28 1048.49,121.65 1046.63,115.19 1044.05,108.97 1040.8,103.08 1036.91,97.59 1032.42,92.58 1027.41,88.09 1021.92,84.2 1016.03,80.95 1009.81,78.37 1003.35,76.51 996.72,75.38 995.1,75.29 995.1,160 995.1,160.01 994.71,169.87 993.55,179.68 991.62,189.37 988.94,198.88 985.52,208.14 981.38,217.12 976.56,225.73 971.07,233.95 964.95,241.71 958.25,248.95 958.25,248.96 888.96,318.25 888.65,318.46 882.73,324.86 877.11,331.99 872.06,339.55 867.62,347.47 863.82,355.72 860.67,364.25 858.21,372.99 856.44,381.9 855.37,390.92 855.03,399.63 855.1,400 855.1,485 855.1,485.01 854.71,494.87 853.55,504.68 851.62,514.37 848.94,523.88 845.52,533.14 841.38,542.12 836.56,550.73 831.07,558.95 824.95,566.71 818.25,573.95 818.25,573.96 803.96,588.25 803.65,588.46 797.73,594.86 792.11,601.99 787.06,609.55 782.62,617.47 778.82,625.72 775.67,634.25 773.21,642.99 771.44,651.9 770.37,660.92 770.03,669.63 770.1,670 770.1,760 770.03,760.36 770.39,765.87 771.54,771.65 773.43,777.22 776.03,782.5 779.3,787.39 783.18,791.82 787.61,795.7 792.5,798.97 797.78,801.57 803.35,803.46 809.13,804.61 814.64,804.97
GND on GND (split plane): 996.72,959.62 1003.35,958.49 1009.81,956.63 1016.03,954.05 1021.92,950.8 1027.41,946.91 1032.42,942.42 1036.91,937.41 1040.8,931.92 1044.05,926.03 1046.63,919.81 1048.49,913.35 1049.62,906.72 1049.96,900.59 1049.9,900 1049.9,753.47 1049.81,752.5 1049.84,752.17 1050.15,746.6 1051.14,740.78 1052.78,735.1 1055.04,729.64 1057.9,724.47 1061.31,719.66 1065.25,715.25 1069.66,711.31 1074.47,707.9 1079.64,705.04 1085.1,702.78 1090.78,701.14 1096.6,700.15 1102.17,699.84 1102.5,699.81 1103.47,699.9 1136.9,699.9 1136.9,335.1 1103,335.1 1102.67,335.06 1097.1,334.75 1091.28,333.76 1085.6,332.13 1080.14,329.87 1074.97,327.01 1070.16,323.59 1065.75,319.65 1061.81,315.25 1058.4,310.43 1055.54,305.26 1053.28,299.8 1051.64,294.13 1050.65,288.3 1050.6,287.34 1050.56,287.21 1050.29,286.32 1049.9,282.4 1049.9,135 1049.96,134.41 1049.62,128.28 1048.49,121.65 1046.63,115.19 1044.05,108.97 1040.8,103.08 1036.91,97.59 1032.42,92.58 1027.41,88.09 1021.92,84.2 1016.03,80.95 1009.81,78.37 1003.35,76.51 996.72,75.38 990.59,75.04 990,75.1 285.1,75.1 285.1,347 285.06,347.33 284.75,352.9 283.76,358.72 282.13,364.4 279.87,369.86 277.01,375.03 273.59,379.84 269.65,384.25 265.25,388.19 260.43,391.6 255.26,394.46 249.8,396.72 244.13,398.36 238.3,399.35 232.81,399.66 232.45,399.69 55.1,400.06 55.1,629.73 228.38,629.73 228.48,629.69 232.4,629.31 232.73,629.34 238.3,629.65 244.13,630.64 249.8,632.28 255.26,634.54 260.43,637.4 265.25,640.81 269.65,644.75 273.59,649.16 277.01,653.97 279.87,659.14 282.13,664.6 283.76,670.28 284.75,676.1 285.06,681.67 285.1,682 284.92,683.81 284.92,898.19 285.1,900 285.04,900.59 285.38,906.72 286.51,913.35 288.37,919.81 290.95,926.03 294.2,931.92 298.09,937.41 302.58,942.42 307.59,946.91 313.08,950.8 318.97,954.05 325.19,956.63 331.65,958.49 338.28,959.62 344.41,959.96 345,959.9 990,959.9 990.59,959.96
VDD_5V on GND (split plane): 825.7,795.63 829.27,794.55 832.55,792.79 835.43,790.43 837.79,787.55 839.55,784.27 840.63,780.7 840.96,777.3 840.9,777 840.9,609 840.9,576 840.97,575.64 840.61,570.13 839.46,564.35 837.57,558.78 834.97,553.5 831.7,548.61 827.82,544.18 823.39,540.3 818.5,537.03 813.22,534.43 807.65,532.54 801.87,531.39 796.36,531.03 796,531.1 104,531.1 103.77,531.05 101.68,531.33 99.51,532.23 97.65,533.65 96.23,535.51 95.33,537.68 95.05,539.77 95.1,540 95.1,575.06 95.1,590 95.06,590.2 95.29,592.53 96.02,594.96 97.22,597.2 98.83,599.17 100.8,600.78 103.04,601.98 105.47,602.71 107.8,602.94 108,602.9 771,602.9 771.02,602.91 775.86,603.29 780.61,604.43 785.12,606.29 789.28,608.84 792.99,612.01 796.16,615.72 798.71,619.88 800.57,624.39 801.71,629.14 802.09,633.98 802.1,634 802.1,784 802.06,784.19 802.27,786.33 802.95,788.58 804.06,790.64 805.54,792.46 807.36,793.94 809.42,795.05 811.67,795.73 813.81,795.94 814,795.9 822,795.9 822.3,795.96

## Keep-outs
Keep-Out Layer:
  lines w10: 232.4,379.6 cw(c232.4,347) 265,347 265,72.07 ccw(c282.07,72.07) 282.07,55 990,55 ccw(c990,135) 1070,135 1070,282.4 ; 232.4,380 35,380 35,649.82 232.4,649.82 ; 232.4,649.4 ccw(c232.4,682) 265,682 ; 264.82,682 264.82,900 ; 265,900 cw(c345,900) 345,980 990,980 cw(c990,900) 1070,900 1070,752.5 ; 1069.9,752.5 ccw(c1102.5,752.5) 1102.5,719.9 ; 1070.4,282.4 cw(c1103,282.4) 1103,315 1157,315 1157,720 1102.5,720

## Other copper
Top1:
  pour cut-out: 217.01,22.25 217.01,155.25 cw(c231.01,155.25) 231.01,169.25 487.01,169.25 cw(c487.01,119.25) 537.01,119.25 537.01,22.25 cw(c487.01,22.25) 487.01,-27.75 267.01,-27.75 cw(c267.01,22.25)
Bottom4:
  pour cut-out: 218,22 218,155 cw(c232,155) 232,169 488,169 cw(c488,119) 538,119 538,22 cw(c488,22) 488,-28 268,-28 cw(c268,22)
GND (plane layer: these items are gaps in the copper):
  lines w10: 90,540 ccw(c104,540) 104,526 796,526 ccw(c796,576) 846,576 846,609 846,777 ccw(c822,777) 822,801 814,801 ccw(c814,784) 797,784 797,634 cw(c771,634) 771,608 108,608 ccw(c108,590) 90,590 90,540 ; 90,575.06 ccw(c90,575.06) 90,575.06
PWR (plane layer: these items are gaps in the copper):
  lines w10: 765,670 ccw(c885.71,670) 800.36,584.64 814.64,570.36 cw(c729.29,485) 850,485 850,400 ccw(c970.71,400) 885.36,314.64 954.64,245.36 cw(c869.29,160) 990,160 990,45 ccw(c1040,45) 1040,-5 1190,-5 ccw(c1190,45) 1240,45 1240,739 1074,739 966,739 cw(c966,859.71) 880.64,774.36 866.21,788.79 ccw(c815,737.57) 815,810 ccw(c815,760) 765,760 765,670

## Silkscreen, mask and mechanical layers (free items; w line width, h text height)
Bottom Overlay:
  text "Designed By" at 562,166 h30
  text "PengZhihui" at 542,126 h45
  text "3" at 820,106 h80
  text "Modified By" at 562,91 h30
  text "ZhouHuanxin" at 542,56 h45
  text "Holo" at 1054,51 h125
Drill Drawing:
  text ".Legend" at 1803,153.33 h40

## Text inside footprints (layer, text, board x,y; h text height)
SD1: Bottom Overlay "Cd" at 361.61,793.5 h30 r180; Bottom Overlay "8" at 383.61,740.5 h30 r90; Bottom Overlay "7" at 384.61,696.5 h30 r90; Bottom Overlay "6" at 384.61,654.5 h30 r90; Bottom Overlay "5" at 384.61,612.5 h30 r90; Bottom Overlay "4" at 385.61,570.5 h30 r90; Bottom Overlay "3" at 385.61,523.5 h30 r90; Bottom Overlay "2" at 385.61,481.5 h30 r90; Bottom Overlay "1" at 386.61,438.5 h30 r90